# EAGLE board Daring Elzing-Fulffy (3) (EAGLE 9.7.0)

Size 127.38 x 99.46 mm. Coordinates in mm from the lower left corner, seen from the top.
Outline: 0,0 127.38,0 127.38,99.46 0,99.46 0,0
Copper layers (1*16): Top 0.035mm / dielectric 1.5mm / Bottom 0.035mm
Design rules "default": minimum track width 6mil, minimum drill 0.35mm, track to track 6mil, track to pad 6mil, pad to pad 6mil, via to via 6mil, smd to smd 6mil, copper to edge 40mil, drill to drill 6mil, minimum pad ring 10mil, minimum via ring 8mil, stop-mask expansion 4mil, vias tented up to drill 0mil, thermal gap 10mil

## Footprints (pad centres in the part's own frame; a part is rotated, then mirrored left to right if it is on the bottom)
LEDRD254W60D565H860B_B = drill 0.981 pad 1.581: 1 -1.27,0; 2 1.27,0
LEDRD254W60D565H860B = drill 0.981 pad 1.581: 1 -1.27,0; 2 1.27,0
LEDRD254W60D565H860B_G = drill 0.981 pad 1.581: 1 -1.27,0; 2 1.27,0
RESAD1016W63L850D250B = drill 0.83 pad 1.43: 1 -5.08,0; 2 5.08,0
SWITCH-MOMENTARY-PTH-6.5MM = drill 1.016 pad 1.88: 1 -3.251,2.261; 2 3.251,2.261; 3 -3.251,-2.261; 4 3.251,-2.261
SWITCH-SPDT-PTH-8.5X3.7MM = drill 1.016 pad 1.88: 1 -2.54,0; 2 0,0; 3 2.54,0
ARDUINO-UNO-R3-SHIELD = drill 1.016 pad 1.88: 3.3V 24.13,-2.54; 5V 24.13,0; A0 24.13,12.7; A1 24.13,15.24; A2 24.13,17.78; A3 24.13,20.32; A4 24.13,22.86; A5 24.13,25.4; AREF -24.13,-13.97; D2 -24.13,20.32; D3 -24.13,17.78; D4 -24.13,15.24; D5 -24.13,12.7; D6 -24.13,10.16; D7 -24.13,7.62; D8 -24.13,3.81; D9 -24.13,1.27; D10 -24.13,-1.27; D11 -24.13,-3.81; D12 -24.13,-6.35; D13 -24.13,-8.89; GND@0 24.13,2.54; GND@1 24.13,5.08; GND@2 -24.13,-11.43; IOREF 24.13,-7.62; NC 24.13,-10.16; RES 24.13,-5.08; RX -24.13,25.4; SCL -24.13,-19.05; SDA -24.13,-16.51; TX -24.13,22.86; VIN 24.13,7.62

## Placement (x,y rotation side)
D1  BLUE  [LEDRD254W60D565H860B_B]  42.24,91.41 0 top
D2  RED  [LEDRD254W60D565H860B]  62.56,73.63 0 top
D3  GREEN  [LEDRD254W60D565H860B_G]  29.54,91.41 0 top
R1  1k  [RESAD1016W63L850D250B]  63.83,86.33 90 top
R2  1k  [RESAD1016W63L850D250B]  28.27,83.79 90 top
R3  1k  [RESAD1016W63L850D250B]  40.97,83.79 90 top
S1  SWITCH_MOMENTARY  [SWITCH-MOMENTARY-PTH-6.5MM]  43.51,74.9 90 top
S2  SWITCH_MOMENTARY  [SWITCH-MOMENTARY-PTH-6.5MM]  30.81,74.9 90 top
S3  TOGGLE  [SWITCH-SPDT-PTH-8.5X3.7MM]  119.96,70.98 0 top
U1  ARDUINO-UNO-R3-SHIELD  [ARDUINO-UNO-R3-SHIELD]  47.88,29.84 270 top

## Library data of the parts
D1 = Tinkercad; CATEGORY: Opto-Electronic; SUB-CATEGORY: LED; VALUE: LED_BLUE
D2 = Tinkercad; CATEGORY: Opto-Electronic; SUB-CATEGORY: LED; VALUE: LED_RED
D3 = Tinkercad; CATEGORY: Opto-Electronic; SUB-CATEGORY: LED; VALUE: LED_GREEN
R1-R3 S1-S3 U1 = Tinkercad

## Nets
D1_A: D1.1 R3.2
D2_C: D2.2 R1.1
D3_A: D3.1 R2.2
S1_2: R3.1 S1.1 S1.2
S2_2: R2.1 S2.1 S2.2
S3_O: D1.2 D3.2 R1.2 S3.1
U1_D4: D2.1 U1.D4
U1_D10: S1.3 S1.4 U1.D10
U1_D13: S2.3 S2.4 U1.D13
U1_GND: S3.2 U1.GND@0 U1.GND@1 U1.GND@2

## Tracks (layer width: path | path; a pad name or v marks a point on that pad's centre or on a via)
D1_A  (1 unrouted)
D2_C  (1 unrouted)
D3_A  (1 unrouted)
S1_2  (2 unrouted)
S2_2  (2 unrouted)
S3_O  (3 unrouted)
U1_D4  (1 unrouted)
U1_D10  (2 unrouted)
U1_D13  (2 unrouted)
U1_GND  (3 unrouted)